# Altium PCB LinkLite-c.PcbDoc
Units mm, origin at the board's own origin, x right, y up, seen from the top; angles counter-clockwise.
Board outline 29 x 55 mm, 2 copper layers (Top Layer, Bottom Layer); 62 components, 55 nets, 202 pads, 133 vias.
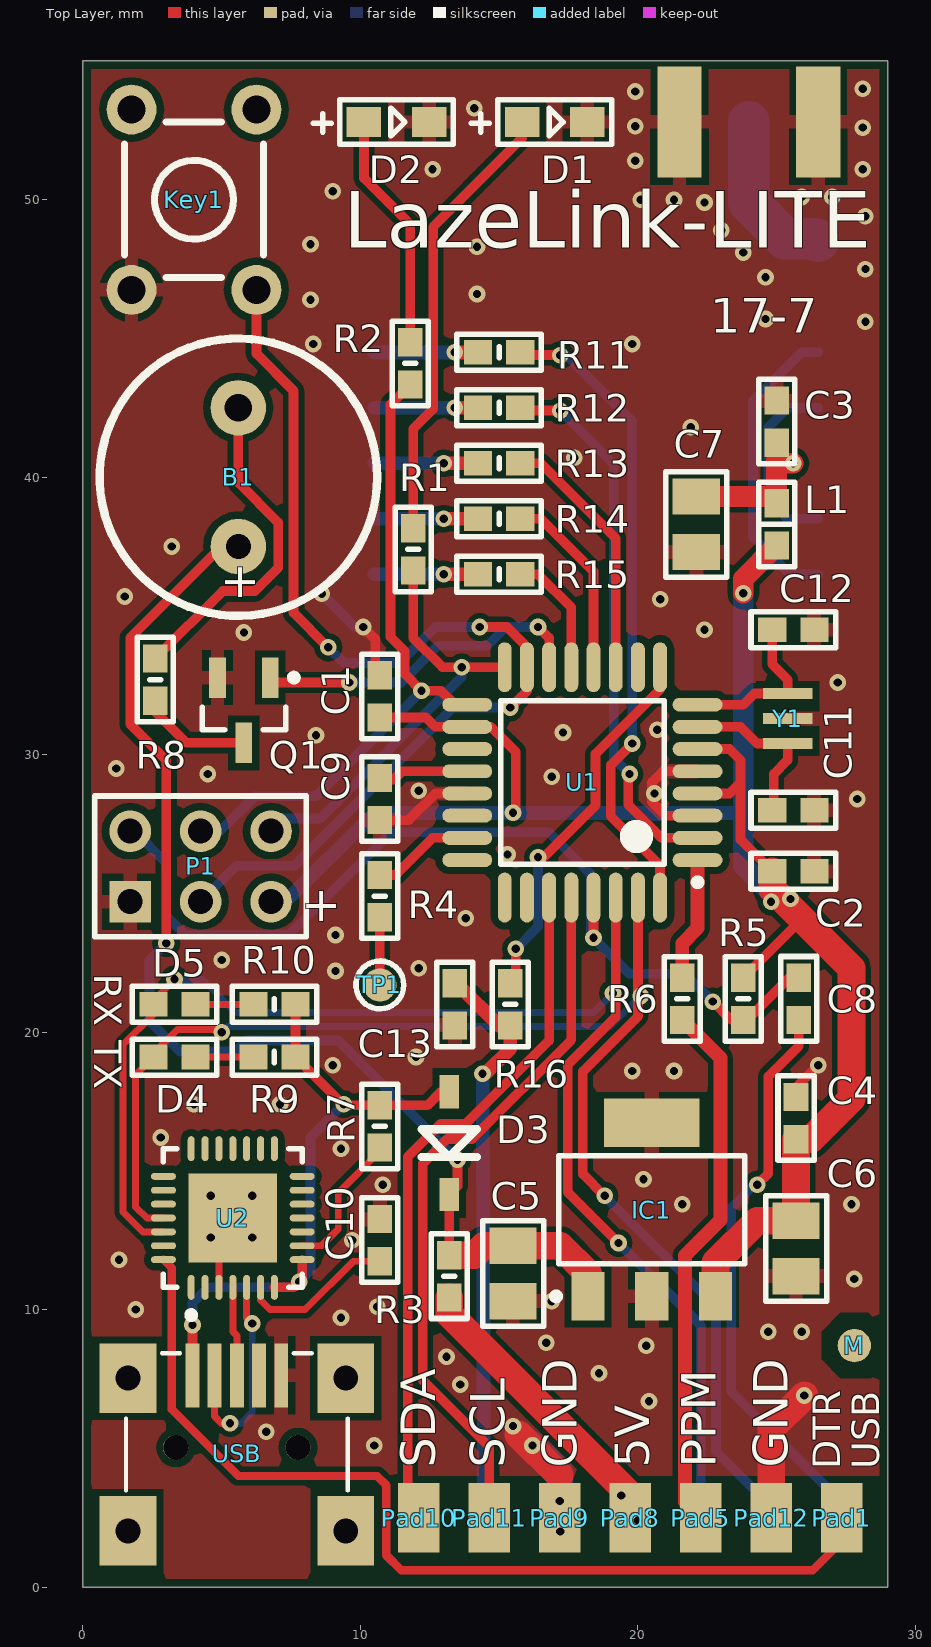
[diagram p0: Top Layer view]
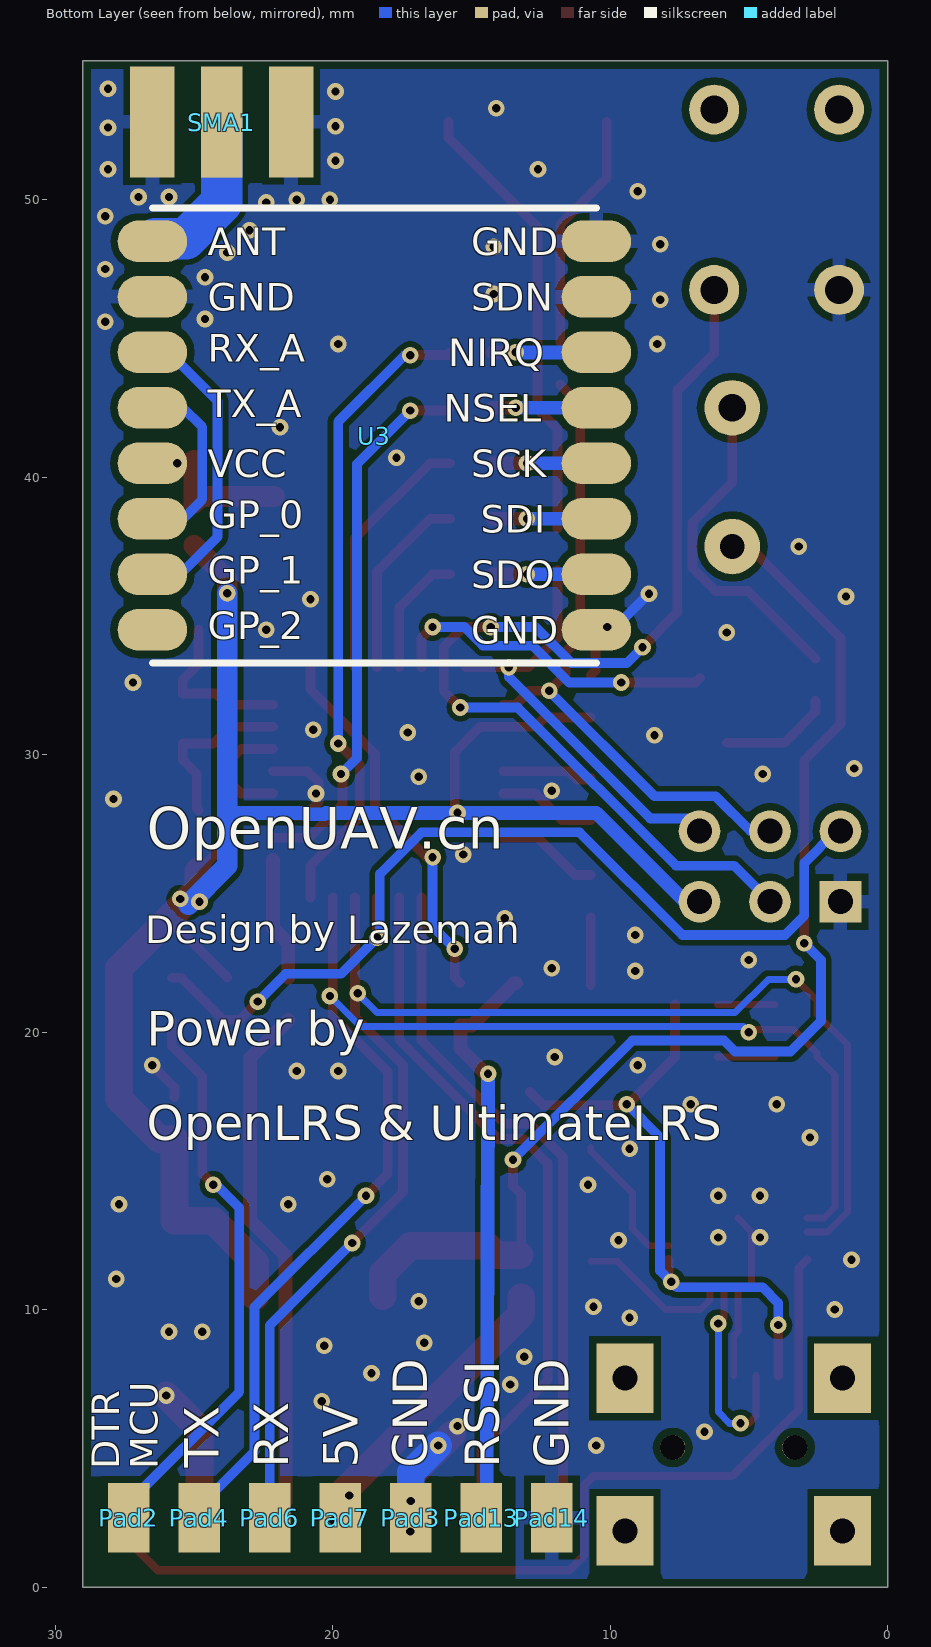
[diagram p1: Bottom Layer view, seen from below]

## Layer stack, top to bottom
Top Solder: solder mask 0.0102, Solder Resist, Dk 3.5
Top Layer: signal copper 0.0356
Dielectric 1: dielectric 0.32, FR-4, Dk 4.8
Bottom Layer: signal copper 0.0356
Bottom Solder: solder mask 0.0102, Solder Resist, Dk 3.5

## Board outline
0,0 0,55 29,55 29,0

## Design rules (kind name [scope] priority, off if disabled: settings)
BoardOutlineClearance BoardOutlineClearance_1 [OnLayer('Top Overlay')] p1: gap=0
BoardOutlineClearance [All] p2: gap=0.3
Clearance [All] p1: gap=0.2 except(0.26: Arc-THPad Arc-Fill Track-THPad Track-Fill SMDPad-THPad SMDPad-Fill SMDPad-Poly SMDPad-Region SMDPad-Text THPad-THPad THPad-Fill THPad-Poly THPad-Region THPad-Text Via-Fill Fill-Fill)
ComponentClearance [All] p1: gap=0.25 collisioncheckmode=3 verticalgap=0 showdistances=FALSE
HoleSize [All] p1: absolutevalues=TRUE maxlimit=6 minlimit=0.3 maxpercent=80.000 minpercent=20.000
HoleToHoleClearance [All] p1: gap=0.2 allowstackedmicrovias=TRUE
MinimumSolderMaskSliver [All] p1: minsoldermaskwidth=0
PolygonConnect PolygonConnect_1 [isVia vs InNet('Gnd')] p1: connectstyle=Direct reliefconductorwidth=0.254 reliefentries=4 polygonreliefangle="90 Angle" airgapwidth=0.254
PolygonConnect [All] p2: connectstyle=Relief reliefconductorwidth=0.5 reliefentries=4 polygonreliefangle="90 Angle" airgapwidth=0.254
RoomDefinition LinkLite [InComponentClass('LinkLite')] p1: confinementstyle=ConfineOut formatcopy=TRUE lockcomponents=FALSE outline 191.408,62.169 330.219,62.169 330.219,138.75 191.408,138.75
RoutingVias [All] p1: holewidth=0.3 width=0.6 viastyle="Through Hole" minholewidth=0.3 minwidth=0.6 maxholewidth=3 maxwidth=3
SilkToSilkClearance [All] p1: silktosilkclearance=0
SilkToSolderMaskClearance [IsPad] p1: minsilkscreentomaskgap=0 clearancetoexposedcopper=TRUE
SolderMaskExpansion [All] p1: expansion=0.102
Width [All] p1: maxlimit=3 minlimit=0.2 preferedwidth=0.35
24 further rules are at their usual default settings.

## Components (designator, comment, footprint, x,y, rotation, side; value= is the part's Value field where it differs from the comment)
B1 "Buzzer" BUZZER9055 5.6,40 r90 top locked
C1 "104" "0603 CAP" 10.7,32.1 r90 top
C2 "104" "0603 CAP" 25.6,25.8 r0 top
C3 "104" "0603 CAP" 25,42 r90 top
C4 "104" "0603 CAP" 25.7,16.9 r90 top
C5 "10uF" 1206 15.5,11.3 r90 top
C6 "10uF" 1206 25.7,12.2 r90 top
C7 "10uF" 1206 22.1,38.3 r270 top
C8 "104" "0603 CAP" 25.8,21.2 r270 top
C9 "104" "0603 CAP" 10.7,28.4 r270 top
C10 "104" "0603 CAP" 10.7,12.5 r270 top
C11 "22p" "0603 CAP" 25.6,28 r180 top
C12 "22p" "0603 CAP" 25.6,34.5 r180 top
C13 "1uF" "0603 CAP" 13.4,21 r90 top
D1 "LED" "0805 LED" 17,52.8 r180 top
D2 "LED" "0805 LED" 11.3,52.8 r180 top
D3 "Diode" DIODE-SOD123 13.2,16 r270 top
D4 "LED" "0603 cap" 3.3,19.1 r180 top
D5 "LED" "0603 cap" 3.3,21 r180 top
IC1 "LM2937" LM2937 20.5,13.6 r90 top locked
Key1 "Key666" "KEY 666" 4,50 r90 top locked
L1 "FB 300mA" "0603 IND" 25,38.3 r90 top
M "Mark" MarkPoint 27.8,8.7 r90 top
P1 "Header 3X2" HDR2X3 1.7,24.7 r0 top
Pad1 "EdgePad" edgepad#1 27.345,2.5 r180 top locked
Pad2 "EdgePad" edgepad#1 27.345,2.5 r180 bottom locked
Pad3 "EdgePad" edgepad#1 17.185,2.5 r180 bottom locked
Pad4 "EdgePad" edgepad#1 24.805,2.5 r0 bottom locked
Pad5 "EdgePad" edgepad#1 22.265,2.5 r180 top locked
Pad6 "EdgePad" edgepad#1 22.265,2.5 r0 bottom locked
Pad7 "EdgePad" edgepad#1 19.725,2.5 r180 bottom locked
Pad8 "EdgePad" edgepad#1 19.725,2.5 r180 top locked
Pad9 "EdgePad" edgepad#1 17.185,2.5 r180 top locked
Pad10 "EdgePad" edgepad#2 12.105,6.5 r180 top locked
Pad11 "EdgePad" edgepad#3 14.5,2.5 r180 top locked
Pad12 "EdgePad" edgepad#1 24.805,2.5 r180 top locked
Pad13 "EdgePad" edgepad#2 14.65,6.5 r0 bottom locked
Pad14 "EdgePad" edgepad#1 12.1,2.5 r0 bottom
Q1 "NPN" NPN-SOT-23B_M 5.8,31.6 r270 top
R1 "300" "0603 RES" 11.9,37.4 r90 top
R2 "300" "0603 RES" 11.8,44.1 r90 top
R3 "0R" "0603 RES" 13.2,11.2 r270 top
R4 "1K" "0603 RES" 10.7,24.9 r90 top
R5 "10K" "0603 RES" 23.8,21.2 r90 top
R6 "1K" "0603 RES" 21.6,21.2 r90 top
R7 "10K" "0603 RES" 10.7,16.6 r90 top
R8 "100" "0603 RES" 2.6,32.7 r270 top
R9 "1k" "0603 RES" 6.9,19.1 r180 top
R10 "1k" "0603 RES" 6.9,21 r180 top
R11 "1k" "0603 RES" 15,44.5 r0 top
R12 "1k" "0603 RES" 15,42.5 r0 top
R13 "1k" "0603 RES" 15,40.5 r0 top
R14 "1k" "0603 RES" 15,38.5 r0 top
R15 "1k" "0603 RES" 15,36.5 r0 top
R16 "10K" "0603 RES" 15.4,21 r90 top
SMA1 "SMA Base" "ANT SMA" 24,52.8 r0 bottom
TP1 "Test Pad" "Test Pad 1.2MM" 10.7,21.7 r0 top
U1 "ATmega328" ATMEGA328FIX 18,29 r180 top locked
U2 "CP2102" CP2102 5.4,13.3 r90 top locked
U3 "RFM22" RFM22SMD 18.5,41.5 r180 bottom locked
USB "USB" "MINI USB A" 5.6,4.4 r0 top locked
Y1 "Crystal3Foot" Crystal3Foot 25.4,31.3 r180 top

## Footprints (in the part's own frame and the unit in brackets; to place one, negate y for a bottom-side part, rotate by r counter-clockwise, add the part's x,y. Pads: shape width x height; smd on the part's side, far side on the other; paste and mask are expansions set on the pad)
"0603 CAP" [mil]
  rect 40x35 smd: 1(-29.92,0) 2(29.92,0)
  silkscreen extent -60,-26 60,26
"0603 cap" [mil]
  rect 40x35 smd: 1(-29.92,0) 2(29.92,0)
  silkscreen extent -60,-26 60,26
"0603 IND" [mil]
  rect 40x35 smd: 1(-29.92,0) 2(29.92,0)
  silkscreen extent -60,-26 60,26
"0603 RES" [mil]
  rect 40x35 smd: 1(-29.92,0) 2(29.92,0)
  silkscreen extent -60,-26 60,26
"0805 LED" [mil]
  rect 49x43 smd: 1(46.26,0) 2(-46.26,0)
  silkscreen extent -81,-31 118,31
1206 [mm]
  rect 1.3x1.7 smd: 1(-1,0) 2(1,0)
  silkscreen extent -1.9,-1.1 1.9,1.1
"ANT SMA" [mm]
  rect 1.5x4 smd: 1(0,0)
  rect 1.6x4 smd far side: 2(-2.5,0) 2(2.5,0)
  rect 1.6x4 smd: 2(-2.5,0) 2(2.5,0)
ATMEGA328FIX [mm] "QFP, 32-Leads, Body 9.0x9.0mm (max), Pitch 0.80mm, IPC Medium Density"
  oval 1.8x0.5 smd: 1(-4.15,2.8) 2(-4.15,2) 3(-4.15,1.2) 4(-4.15,0.4) 5(-4.15,-0.4) 6(-4.15,-1.2) 7(-4.15,-2) 8(-4.15,-2.8) 17(4.15,-2.8) 18(4.15,-2) 19(4.15,-1.2) 20(4.15,-0.4) 21(4.15,0.4) 22(4.15,1.2) 23(4.15,2) 24(4.15,2.8)
  oval 0.5x1.8 smd: 9(-2.8,-4.15) 10(-2,-4.15) 11(-1.2,-4.15) 12(-0.4,-4.15) 13(0.4,-4.15) 14(1.2,-4.15) 15(2,-4.15) 16(2.8,-4.15) 25(2.8,4.15) 26(2,4.15) 27(1.2,4.15) 28(0.4,4.15) 29(-0.4,4.15) 30(-1.2,4.15) 31(-2,4.15) 32(-2.8,4.15)
  silkscreen extent -4.28,-2.95 2.95,3.72, body extent -3.5,-3.5 3.5,3.5, height 2
BUZZER9055 [mm]
  round 2 hole 0.9: 1(-2.5,0)
  round 2 hole 1: 2(2.5,0)
  silkscreen extent -5,-5 5,5
CP2102 [mm] "QFN, 28-Leads, Body 5.0x5.0mm (max), Pitch 0.50mm, IPC Low Density"
  oval 0.9x0.25 smd: 1(-2.5,1.5) 2(-2.5,1) 3(-2.5,0.5) 4(-2.5,0) 5(-2.5,-0.5) 6(-2.5,-1) 7(-2.5,-1.5) 15(2.5,-1.5) 16(2.5,-1) 17(2.5,-0.5) 18(2.5,0) 19(2.5,0.5) 20(2.5,1) 21(2.5,1.5)
  oval 0.25x0.9 smd: 8(-1.5,-2.5) 9(-1,-2.5) 10(-0.5,-2.5) 11(0,-2.5) 12(0.5,-2.5) 13(1,-2.5) 14(1.5,-2.5) 22(1.5,2.5) 23(1,2.5) 24(0.5,2.5) 25(0,2.5) 26(-0.5,2.5) 27(-1,2.5) 28(-1.5,2.5)
  rect 3.2x3.2 smd: 29(0,0)
  silkscreen extent -3.62,-2.5 2.5,2.5, body extent -2.5,-2.5 2.5,2.5, height 1
Crystal3Foot [mm]
  rect 1.8x0.4 smd: 1(0,0.9) 2(0,0) 3(0,-0.9)
  body extent -0.8,-1.5 0.8,1.5, height 0.5
DIODE-SOD123 [mm]
  rect 1.2x0.7 smd: 1(-1.85,0) 2(1.85,0)
  silkscreen extent -0.5,-1 0.5,1, body extent -1.25,-0.75 1.25,0.75, height 1
edgepad#1 [mm]
  rect 1.5x2.5 smd: 1(0,0)
edgepad#2 [mm]
  rect 1.5x2.5 smd: 1(0,4)
edgepad#3 [mm]
  rect 1.5x2.5 smd: 1(-0.145,0)
HDR2X3 [mm] "Connector; Header; 3x2 Position"
  rect 1.5x1.5 hole 0.9: 1(0,0)
  round 1.5 hole 0.9: 2(0,2.54) 3(2.54,0) 4(2.54,2.54) 5(5.08,0) 6(5.08,2.54)
  silkscreen extent -1.27,-1.27 6.35,3.81
"KEY 666" [mm]
  round 1.8 hole 1: 1(-3.25,2.25) 2(-3.25,-2.25) ""(3.25,-2.25) ""(3.25,2.25)
  silkscreen extent -2.8,-2.5 2.8,2.5
LM2937 [mm] "SOT223, 4-Leads, Body 6.50x7.00mm (avg), Pitch 2.30mm, IPC Medium Density"
  rect 1.75x1.2 smd: 1(-3.125,2.3) 2(-3.125,0) 3(-3.125,-2.3)
  rect 1.75x3.45 smd: 2(3.125,0)
  silkscreen extent -3.25,-3.35 1.95,3.57, body extent -1.85,-3.35 1.85,3.35, height 1.8
MarkPoint [mm]
  round 1.2 smd: 0(0,0)
  round 1.8 on Top Solder: 0(0,0)
  Top Layer pour cut-out: -0.5,1.2 0.5,1.2 1.2,0.5 1.2,-0.5 0.5,-1.2 -0.6,-1.2 -1.2,-0.6 -1.2,0.5
"MINI USB A" [mm]
  rect 2.05x2.5 hole 0.9 unplated: 0(-3.98,-2.374) 0(-3.98,3.126) 0(3.87,-2.374) 0(3.87,3.126)
  rect 0.5x2.3 smd mask+0.085: 1(-1.655,3.226) 2(-0.855,3.226) 3(-0.055,3.226) 4(0.745,3.226) 5(1.545,3.226)
  round 0.9 hole 0.9 unplated: 6(-2.255,0.626) 6(2.145,0.626)
  silkscreen extent -4.06,-0.92 3.95,4.03, body extent -5.11,-5.22 4.8,3.98, height 4.17
NPN-SOT-23B_M [mm] "SOT23, 3-Leads, Body 2.9x1.3mm, Pitch 0.95mm, Lead Span 2.4mm, IPC Low Density"
  rect 1.45x0.6 smd: 1(-1.175,0.95) 2(-1.175,-0.95) 3(1.175,0)
  silkscreen extent -1.3,-1.5 0.7,1.93, body extent -0.7,-1.5 0.7,1.5, height 1.14
RFM22SMD [mm]
  oval 2.5x1.5 smd: 1(-8,7) 2(-8,5) 3(-8,3) 4(-8,1) 5(-8,-1) 6(-8,-3) 7(-8,-5) 8(-8,-7) 9(8,-7) 10(8,-5) 11(8,-3) 12(8,-1) 13(8,1) 14(8,3) 15(8,5) 16(8,7)
  silkscreen extent -8,-8.2 8,8.2
"Test Pad 1.2MM" [mm]
  round 1.2 smd: 1(0,0)
  silkscreen extent -0.86,-0.86 0.86,0.86

## Part data
C1 C2 C3 C4 C5 C6 C7 C8 C9 C10 C11 C12 C13: library part CAP, "Capacitor"
D1 D2 D4 D5: "Typical RED, GREEN, YELLOW, AMBER GaAs LED"
L1: library part FerriteBead_300mA, "Ferrite Bead 300mA"
P1: "Header, 3-Pin, Dual row"
R1 R2 R3 R4 R5 R6 R7 R8 R9 R10 R11 R12 R13 R14 R15 R16: library part Res, "Resistor"
USB: library part USB_SMT_B, "USB Type-B SMT Socket"

## Via types
v1: diameter 0.6, hole 0.3, Top Layer to Bottom Layer, tented both sides, 133 vias

## Nets (pads, with @x,y where several pads share a name; then routed paths per layer and width w, separated by ;. In a path a pad name is that pad's centre, name@x,y a point inside that pad or via, vN(x,y) a via of type N, cw(c..) or ccw(c..) an arc to the next point about the centre after c; other vN are vias at no path point)
3V3: C1.1 C2.1 C4.1 C6.2 IC1.3 L1.1 P1.5 R5.2 U1.4 U1.6 U1.18 | length 70.7
  Top Layer w0.35: C1.1 12.36,31.34 12.7,31 U1.18 14.7,31 15.6,30.1 15.6,28 v1(15.5,27.9) ; U1.4 23.3,28.6 23.7,29 ; U1.6 23.3,30.2 23.7,29.8 23.7,29 ; R5.2 25.8,23.96 25.8,24.2 ; C2.1 23.7,26.94 23.7,29
  Top Layer w0.75: v1(23.8,35.814) 23.8,36.34 L1.1
  Top Layer w1: IC1.3 22.8,11.7 24.3,13.2 C6.2 C4.1 26.24,16.14 27.7,17.6 27.7,22.3 25.8,24.2 24.84,25.16 C2.1
  Bottom Layer w0.5: P1.5 7.3,24.7 10.5,27.9 20.239,27.9 20.289,27.85 20.911,27.85 20.961,27.9 23.8,27.9
  Bottom Layer w0.75: v1(23.8,35.814) 23.8,26 25.2,24.6
  other v1: 24.8,24.7 25.5,24.8
3V3-RF: C3.1 C7.1 L1.2 U3.5 | length 5.2
  Top Layer w0.75: C7.1 24.76,39.3 L1.2 25,40.6 25.1,40.5 v1(25.6,40.5)
A0: R4.2 U1.23 | length 3.7
  Top Layer w0.35: R4.2 11.26,25.66 12.6,27 U1.23
A1: U1.24
A2: U1.25
A3: U1.26
A4/SDA: Pad10.1 U1.27 | length 25.2
  Top Layer w0.35: Pad10.1 11.7,2.905 11.7,15.5 12.9,16.7 13.8,16.7 16.8,19.7 U1.27
A5/SCL: Pad11.1 U1.28 | length 26.1
  Top Layer w0.35: Pad11.1 14.645,5.055 12.25,7.45 12.25,15.272 13.128,16.15 14.028,16.15 17.6,19.722 U1.28
A6: U1.19
A7: U1.22
ANT: SMA1.1 U3.1 | length 6
  Bottom Layer w1.5: SMA1.1 24,49.9 25.3,48.6 26.4,48.6 U3.1
AREF: C9.1 U1.20 | length 3.3
  Top Layer w0.35: C9.1 10.76,29.1 11.2,29.1 11.5,29.4 U1.20
D2: R11.2 U1.32 | length 23.3
  Top Layer w0.35: R11.2 15.86,44.4 v1(17.2,44.4) ; v1(19.8,30.4) 19.025,29.625 19.025,27.775 20.8,26 U1.32
  Bottom Layer w0.35: v1(17.2,44.4) 17.4,44.4 19.8,42 v1(19.8,30.4)
D3: R6.2 U1.1 | length 4.5
  Top Layer w0.5: R6.2 21.6,23.2 22.15,23.75 U1.1
D4: R12.2 U1.2 | length 19.7
  Top Layer w0.35: R12.2 15.86,42.4 v1(17.2,42.4) ; v1@19.65,29.3 19.65,28.2 20.85,27 U1.2
  Bottom Layer w0.35: v1(17.2,42.4) 19.125,40.475 19.125,29.875 v1(19.7,29.3)
D5: R16.2 U1.9 | length 13.7
  Top Layer w0.35: R16.2 15.6,21.96 v1(15.6,23) ; v1(16.4,26.3) 16.6,26.3 18.475,28.175 18.475,30.03 20.8,32.355 U1.9
  Bottom Layer w0.35: v1(15.6,23) 16.4,23.8 v1(16.4,26.3)
D6: U1.10
D7: R13.2 U1.11 | length 9.2
  Top Layer w0.35: R13.2 16.5,40.5 19.2,37.8 U1.11
D8: R14.2 U1.12 | length 6.9
  Top Layer w0.35: R14.2 16.5,38.5 18.4,36.6 U1.12
D9: R15.2 U1.13 | length 4.5
  Top Layer w0.35: R15.2 16.4,36.5 17.6,35.3 U1.13
D10: Q1.1 U1.14 | length 12.2
  Top Layer w0.35: Q1.1 6.925,32.6 v1(9.6,32.6) ; v1(16.4,34.6) 16.8,34.2 U1.14
  Bottom Layer w0.35: v1(9.6,32.6) 11.478,32.6 12.803,33.925 14.58,33.925 15.255,34.6 v1(16.4,34.6)
D11/MO: Key1.2 P1.3 U1.15 | length 38.7
  Top Layer w0.35: Key1.2 6.25,44.45 7.585,43.115 7.585,35.115 v1(8.835,33.865) ; v1(14.3,34.6) 15.284,34.6 16,33.884 U1.15 16,32.3 v1(15.4,31.7)
  Bottom Layer w0.35: P1.3 5.54,26 7.632,26 13.332,31.7 v1(15.4,31.7) ; v1(8.835,33.865) 9.4,33.3 11.4,33.3 12.7,34.6 v1(14.3,34.6)
D12/MI: P1.6 R1.1 U1.16 | length 15.7
  Top Layer w0.35: R1.1 11.9,34.2 12.95,33.15 v1(13.65,33.15) U1.16
  Bottom Layer w0.35: P1.6 7.24,27.7 8.555,27.7 13.65,32.795 v1(13.65,33.15)
D13/SCK: P1.4 R2.1 U1.17 | length 23.7
  Top Layer w0.35: R2.1 11.08,42.621 11.08,34.242 11.6,33.722 11.6,32.9 v1(12.2,32.3) 12.9,32.3 13.4,31.8 U1.17
  Bottom Layer w0.35: P1.4 4.94,27.24 6.2,28.5 8.4,28.5 v1(12.2,32.3)
DTR-AVR: C8.2 Pad2.1 | length 20.7
  Top Layer w0.35: v1(24.3,14.5) 24.7,14.9 24.7,18.4 25.8,19.5 C8.2
  Bottom Layer w0.35: v1(24.3,14.5) 24.2,14.5 23.365,13.665 23.365,7.035 27.345,3.055 Pad2.1
DTR-USB: Pad1.1 U2.28 | length 34.8
  Top Layer w0.3: U2.28 3.2,11.5 3.2,6.4 5.6,4 9.8,4 10.6,4 10.93,3.67 10.93,1.145 11.475,0.6 26.3,0.6 Pad1.1@27.345,1.645
  Top Layer w0.35: Pad1.1@27.345,1.645 Pad1.1
GND: C1.2 C2.2 C3.2 C4.2 C5.1 C6.1 C7.2 C9.2 C10.1 C11.1 C12.1 C13.1 D1.2 D2.2 IC1.2 Key1.1 P1.1 Pad3.1 Pad9.1 Pad12.1 Pad14.1 Q1.2 SMA1.2 U1.3 U1.5 U1.21 U2.3 U2.29 U3.2 U3.9 U3.15 U3.16 USB.5 Y1.2 | length 25.5
  Top Layer w0.25: U2.3 4.9,12.8 U2.29
  Top Layer w0.35: v1(10.1,34.6) 10.53,34.169 10.53,33.029 C1.2 ; C9.2 11.74,27.64 12.7,28.6 U1.21 ; U1.3 21,27.8 20.5,28.3 20.5,29 20.9,29.4 U1.5 ; C4.2 25.7,18 v1(26.5,18.8)
  Top Layer w1: 15.7,5.5 17.185,4.015 ; Pad12.1 24.805,5.705 v1(26,6.9)
  Bottom Layer w0.35: v1@8.6,35.7 v1(8.6,35.8) 9.8,34.6 v1(10.1,34.6)
  Bottom Layer w1: v1(16.2,5.1) 17.1,4.2 ; v1(17.185,3.1) 17.185,4.115
  other v1: 17.2,2 10.5,5.1 6.6,5.6 15.5,5.8 20.4,6.7 13.6,7.3 18.6,7.7 13.1,8.3 20.3,8.7 16.7,8.8 24.7,9.2 25.9,9.2 9.3,9.7 1.9,10 10.6,10.1 16.9,10.3 27.8,11.1 1.3,11.8 9.7,12.5 4.6,12.6 6.1,12.6 21.6,13.8 27.7,13.8 4.6,14.1 6.1,14.1 10.8,14.5 20.2,14.7 9.3,15.8 2.8,16.2 4,17.4 7.1,17.4 19.8,18.6 21.3,18.6 9,18.8 12,19.1 9.1,22.2 12.1,22.3 5,22.6 9.1,23.5 13.8,24.1 15.3,26.4 27.9,28.4 20.6,28.6 12.1,28.7 16.9,29.2 4.5,29.3 1.2,29.5 8.4,30.7 17.3,30.8 20.7,30.9 27.2,32.6 5.8,34.4 22.4,34.5 20.8,35.6 1.5,35.7 3.2,37.5 17.7,40.7 21.9,41.8 8.3,44.8 19.8,44.8 28.2,45.6 24.6,45.7 8.2,46.4 14.2,46.6 24.6,47.2 28.2,47.5 23.8,48.1 14.2,48.3 8.2,48.4 23,48.9 28.2,49.4 22.4,49.9 20.1,50 21.3,50 25.9,50.1 27,50.1 9,50.3 12.6,51.1 28.1,51.1 19.9,51.4 28.1,52.6 19.9,52.65 14.1,53.3 19.9,53.9 28.1,54
NetB1_2: B1.2 R8.1 | length 12.2
  Top Layer w0.35: R8.1 5.04,35.9 6.2,35.9 7.035,36.735 7.035,38.365 5.6,39.8 B1.2
NetC10_2: C10.2 U2.6 | length 5.6
  Top Layer w0.25: U2.6 6.4,10.339 6.739,10 8,10 9.74,11.74 C10.2
NetC11_2: C11.2 U1.7 Y1.1 | length 6.1
  Top Layer w0.35: U1.7 23.7,31 24.3,30.4 Y1.1 25.4,29.8 24.9,29.3 24.9,28.06 C11.2
NetC12_2: C12.2 U1.8 Y1.3 | length 5.9
  Top Layer w0.35: U1.8 23.8,31.8 24.2,32.2 Y1.3 25.4,32.7 24.84,33.26 C12.2
NetD1_1: D1.1 R1.2 | length 16.3
  Top Layer w0.35: R1.2 11.9,41.738 12.619,42.457 12.619,49.02 15.825,52.225 D1.1
NetD2_1: D2.1 R2.2 | length 8.6
  Top Layer w0.35: D2.1 10.125,50.775 11.8,49.1 R2.2
NetD4_1: D4.1 R9.2 | length 2.1
  Top Layer w0.25: D4.1 R9.2
NetD5_1: D5.1 R10.2 | length 2.1
  Top Layer w0.25: D5.1 R10.2
NetQ1_3: Q1.3 R8.2 | length 4.1
  Top Layer w0.35: R8.2 2.6,31.55 3.725,30.425 Q1.3
NetR7_1: R7.1 U2.9 | length 5.1
  Top Layer w0.25: U2.9 8.6,12.3 9.2,12.9 9.2,14.207 10.7,15.707 R7.1
NetU3_3: U3.3 U3.7 | length 10.9
  Bottom Layer w0.35: U3.7 25.5,36.5 24.15,37.85 24.15,42.75 25.9,44.5 U3.3
NetU3_4: U3.4 U3.6 | length 6.8
  Bottom Layer w0.35: U3.6 25.4,38.5 24.7,39.2 24.7,41.8 25.4,42.5 U3.4
NIRQ: R11.1 U3.14 | length 3.7
  Top Layer w0.5: v1(13.4,44.5) R11.1
  Bottom Layer w0.5: U3.14 v1(13.4,44.5)
NSEL: R12.1 U3.13 | length 3.7
  Top Layer w0.5: v1(13.4,42.5) R12.1
  Bottom Layer w0.5: U3.13 v1(13.4,42.5)
PPM: Pad5.1 R6.1 | length 19.3
  Top Layer w0.5: R6.1 22.978,19.062 22.978,13.222 21.7,11.943 21.7,3.065 Pad5.1
RAW: Pad7.1 Pad8.1 R3.2 | length 10.6
  Top Layer w1: R3.2 13.2,9.837 19.725,3.312 Pad8.1
  other v1: 20,2.4 19.4,3.3
RESET: C8.1 P1.2 R5.1 U1.29 | length 34.5
  Top Layer w0.35: v1(18.4,23.4) U1.29 ; v1(22.7,21.1) 23.36,20.44 R5.1 23.94,20.44 25.46,21.96 C8.1
  Bottom Layer w0.35: P1.2 1.86,27.24 3,26.1 3,24.2 3.7,23.5 7.4,23.5 11.1,27.2 16.8,27.2 18.3,25.7 18.3,23.5 v1(18.4,23.4) 19.7,22.1 21.7,22.1 v1(22.7,21.1)
RF: R4.1 TP1.1 | length 2.4
  Top Layer w0.35: TP1.1 R4.1
RSSI: C13.2 Pad13.1 R16.1 | length 21.3
  Top Layer w0.5: C13.2 13.469,21.76 14.989,20.24 R16.1 15.4,19.4 14.5,18.5 v1(14.4,18.5)
  Bottom Layer w0.5: v1@14.406,18.5 14.449,2.499 Pad13.1@14.45,2
RXI: D5.2 Pad6.1 U1.30 U2.26 | length 52.5
  Top Layer w0.25: U2.26 2.164,12.8 1.45,13.514 1.45,19.55 2.54,20.64 D5.2 2.54,21.14 v1(3.3,21.9)
  Top Layer w0.35: U1.30 19.2,20.544 17.467,18.811 17.467,14.233 v1(19.3,12.4)
  Bottom Layer w0.25: v1(3.3,21.9) 4.3,21.9 5.5,20.7 18.4,20.7 v1(19.1,21.4)
  Bottom Layer w0.35: v1(19.3,12.4) 22.265,9.435 Pad6.1
SCLK: R13.1 U3.12 | length 3.7
  Top Layer w0.5: v1(13,40.5) R13.1
  Bottom Layer w0.5: U3.12 v1(13,40.5)
SDI: R14.1 U3.11 | length 3.7
  Top Layer w0.5: v1(13,38.5) R14.1
  Bottom Layer w0.5: U3.11 v1(13,38.5)
SDO: R15.1 U3.10 | length 3.7
  Top Layer w0.5: v1(13,36.5) R15.1
  Bottom Layer w0.5: U3.10 v1(13,36.5)
TXO: D4.2 Pad4.1 U1.31 U2.25 | length 51.5
  Top Layer w0.25: U2.25 2.3,13.3 1.9,13.7 1.9,18.46 D4.2 2.54,19.24 3.4,20.1 4.9,20.1 v1(5,20)
  Top Layer w0.35: v1(18.8,14.1) 18.017,14.883 18.017,18.583 20,20.567 U1.31
  Bottom Layer w0.25: v1(5,20) 5.2,20.2 19,20.2 v1(20.1,21.3)
  Bottom Layer w0.35: v1(18.8,14.1) 22.815,10.085 22.815,4.885 24.805,2.895 Pad4.1
UN-REG: B1.1 C5.2 D3.2 IC1.1 R3.1 | length 43.3
  Top Layer w0.35: v1(3,23.2) 3,29.8 1.7,31.1 1.7,34.2 5,37.5 B1.1 ; R3.1@13.26,11.96 13.2,12.02 D3.2 13.5,14.45 v1(13.5,15.4)
  Top Layer w1: R3.1@13.26,11.96 14.1,11.96 14.44,12.3 17.2,12.3 18.2,11.3 IC1.1
  Bottom Layer w0.35: v1(3,23.2) 2.4,22.6 2.4,20.4 3.5,19.3 5.5,19.3 5.9,19.7 9.2,19.7 v1(13.5,15.4)
USB_D+: U2.4 USB.3 | length 3.2
  Top Layer w0.25: U2.4 5.4,9.2 5.545,9.055 USB.3
USB_D-: U2.5 USB.2 | length 7.7
  Top Layer w0.25: USB.2 4.745,6.155 5,5.9 v1(5.3,5.9) ; U2.5 5.9,9.7 v1(6.1,9.5)
  Bottom Layer w0.25: v1(5.3,5.9) 5.7,5.9 6.1,6.3 v1(6.1,9.5)
V_USB: D3.1 R7.2 R9.1 R10.1 U2.7 U2.8 USB.1 | length 23.7
  Top Layer w0.35: USB.1 v1(3.945,9.445) ; U2.7 7.6,10.8 v1(7.8,11) 7.9,11.1 U2.8 ; R10.1 R9.1 9.4,17.36 R7.2 11.7,17.36 12.41,17.36 D3.1@12.9,17.85
  Bottom Layer w0.35: v1(3.945,9.445) 3.945,10.245 4.5,10.8 7.6,10.8 v1(7.8,11) 8.2,11.4 8.2,16.2 v1(9.4,17.4)
pads on no net: Key1. M.0 U2.1 U2.2 U2.10 U2.11 U2.12 U2.13 U2.14 U2.15 U2.16 U2.17 U2.18 U2.19 U2.20 U2.21 U2.22 U2.23 U2.24 U2.27 U3.8 USB.0 USB.4 USB.6

## Polygon pours and split planes (outlines as drawn)
GND on Top Layer "GND_L01_P003" (solid, pour order 3): 0,0 0,55 29,55 29,0
GND on Bottom Layer "GND_L02_P004" (solid, pour order 4): 0,0 0,55 29,55 29,0

## Other copper
Top Layer:
  pour cut-out: 10.998,4.005 29,4.005 29,0 10.998,0
Bottom Layer:
  pour cut-out: 22.3,55 25.7,55 25.7,50.6 22.3,50.6
  pour cut-out: 13.4,4 29,4 29,0 13.4,0

## Silkscreen, mask and mechanical layers (free items; w line width, h text height)
Top Overlay:
  text "LazeLink-LITE" at 9.4,47.6 h3.5
  text "17-7" at 22.6,45.2 h1.25
  text "+" at 9.3,24 h1.25
  text "RX" at 0.4,22.1 h1 r270
  text "TX" at 0.4,19.7 h1 r270
  text "SDA" at 12.7,4.3 h1.25 r90
  text "SCL" at 15.2,4.3 h1.25 r90
  text "GND" at 17.8,4.3 h1.25 r90
  text "5V" at 20.4,4.3 h1.25 r90
  text "PPM" at 22.8,4.3 h1.25 r90
  text "GND" at 25.4,4.3 h1.25 r90
  text "DTR" at 27.3,4.25 h1 r90
  text "USB" at 28.7,4.25 h1 r90
Bottom Overlay:
  text "OpenUAV.cn" at 26.7,26.6 h1.5
  text "Design by Lazeman" at 26.75,23.2 h1
  text "Power by" at 26.7,19.5 h1.25
  text "OpenLRS & UltimateLRS" at 26.7,16.1 h1.25
  text "GND" at 11.5,4.3 h1.25 r270
  text "RSSI" at 14,4.3 h1.25 r270
  text "GND" at 16.6,4.3 h1.25 r270
  text "5V" at 19.1,4.3 h1.25 r270
  text "RX" at 21.6,4.3 h1.25 r270
  text "TX" at 24.1,4.3 h1.25 r270
  text "MCU" at 26.3,4.25 h1 r270
  text "DTR" at 27.7,4.25 h1 r270
Mechanical 1:
  the board outline again, w0.3

## Text inside footprints (layer, text, board x,y; h text height)
B1: Top Overlay "+" at 6.2,35.5 h1.25 r90
U3: Bottom Overlay "ANT" at 24.5,48 h1; Bottom Overlay "GND" at 24.5,46 h1; Bottom Overlay "RX_A" at 24.5,44.167 h1; Bottom Overlay "TX_A" at 24.5,42.167 h1; Bottom Overlay "VCC" at 24.5,40 h1; Bottom Overlay "GP_0" at 24.5,38.167 h1; Bottom Overlay "GP_1" at 24.5,36.167 h1; Bottom Overlay "GP_2" at 24.5,34.167 h1; Bottom Overlay "GND" at 15,48 h1; Bottom Overlay "GND" at 15,34 h1; Bottom Overlay "SDN" at 15,46 h1; Bottom Overlay "NIRQ" at 15.833,44 h1; Bottom Overlay "NSEL" at 16,42 h1; Bottom Overlay "SCK" at 15,40 h1; Bottom Overlay "SDI" at 14.667,38 h1; Bottom Overlay "SDO" at 15,36 h1